# Altium PCB PWR_M_V1.PcbDoc
Units mm, origin at the board's own origin, x right, y up, seen from the top; angles counter-clockwise.
Board outline 29.46 x 19 mm, 2 copper layers (Top Layer, Bottom Layer); 42 components, 19 nets, 160 pads, 59 vias.
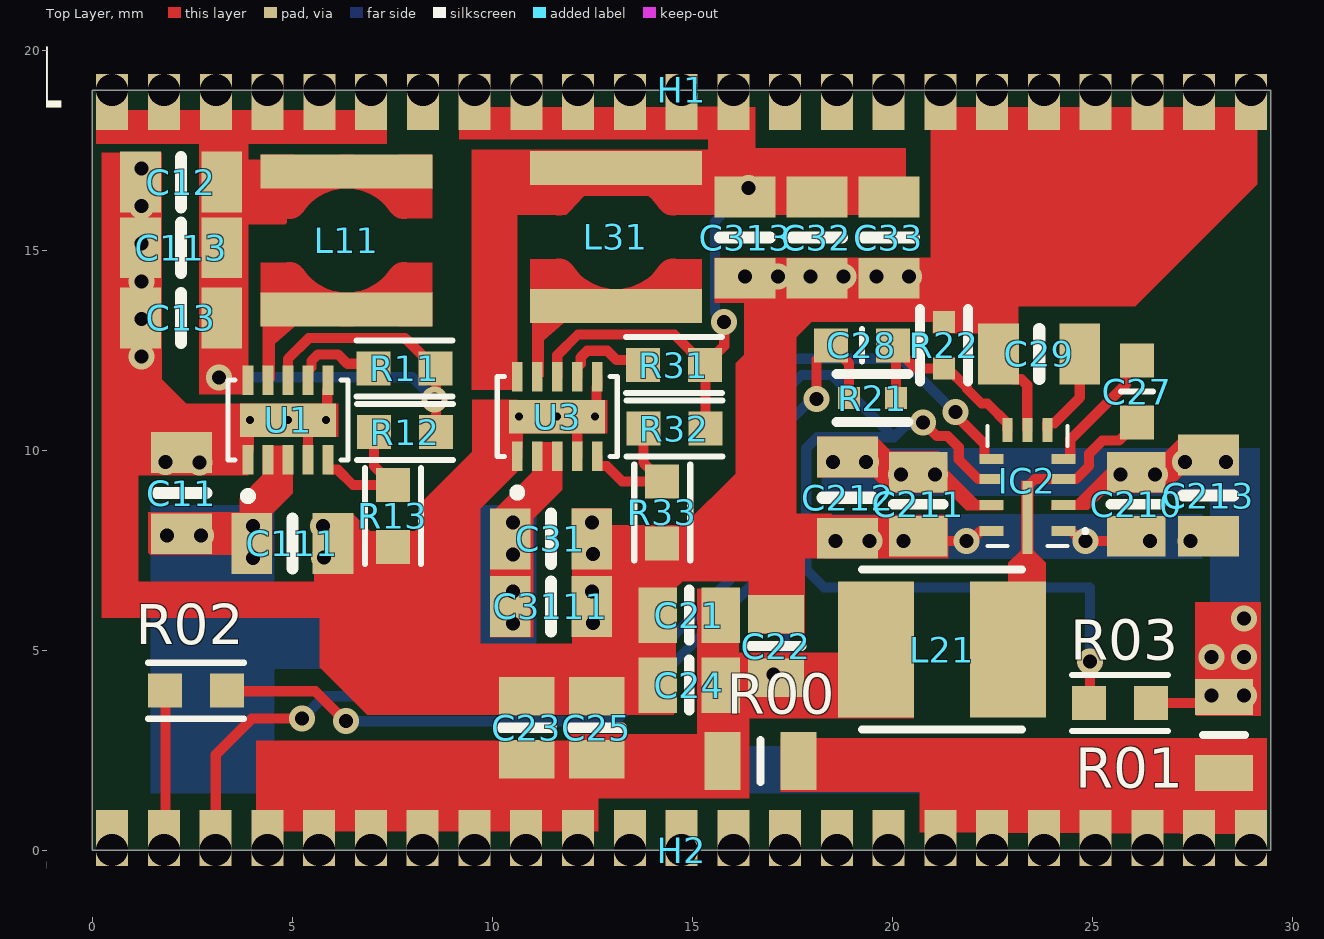
[diagram p0: Top Layer view]
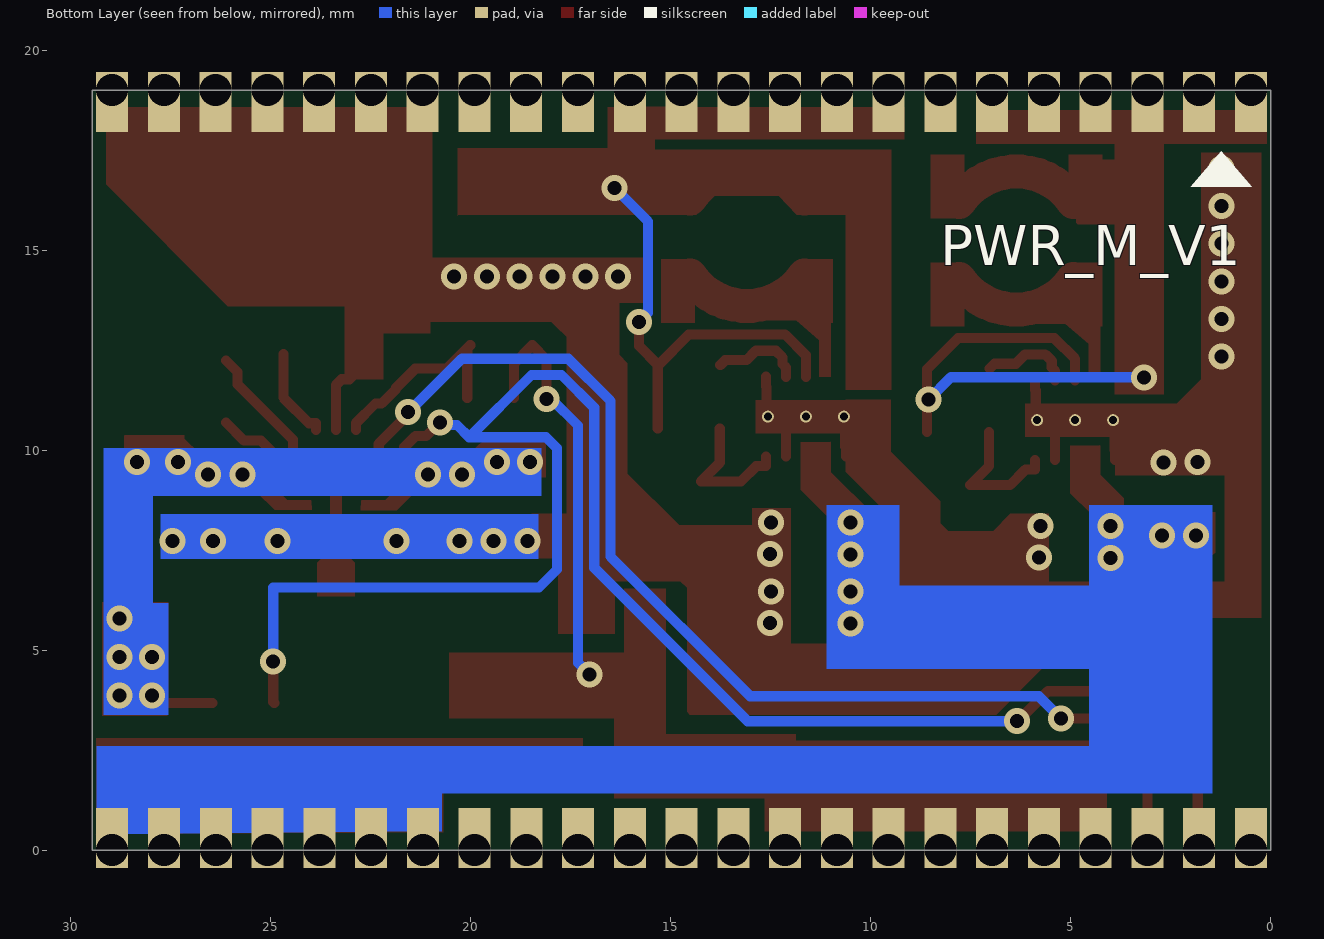
[diagram p1: Bottom Layer view, seen from below]
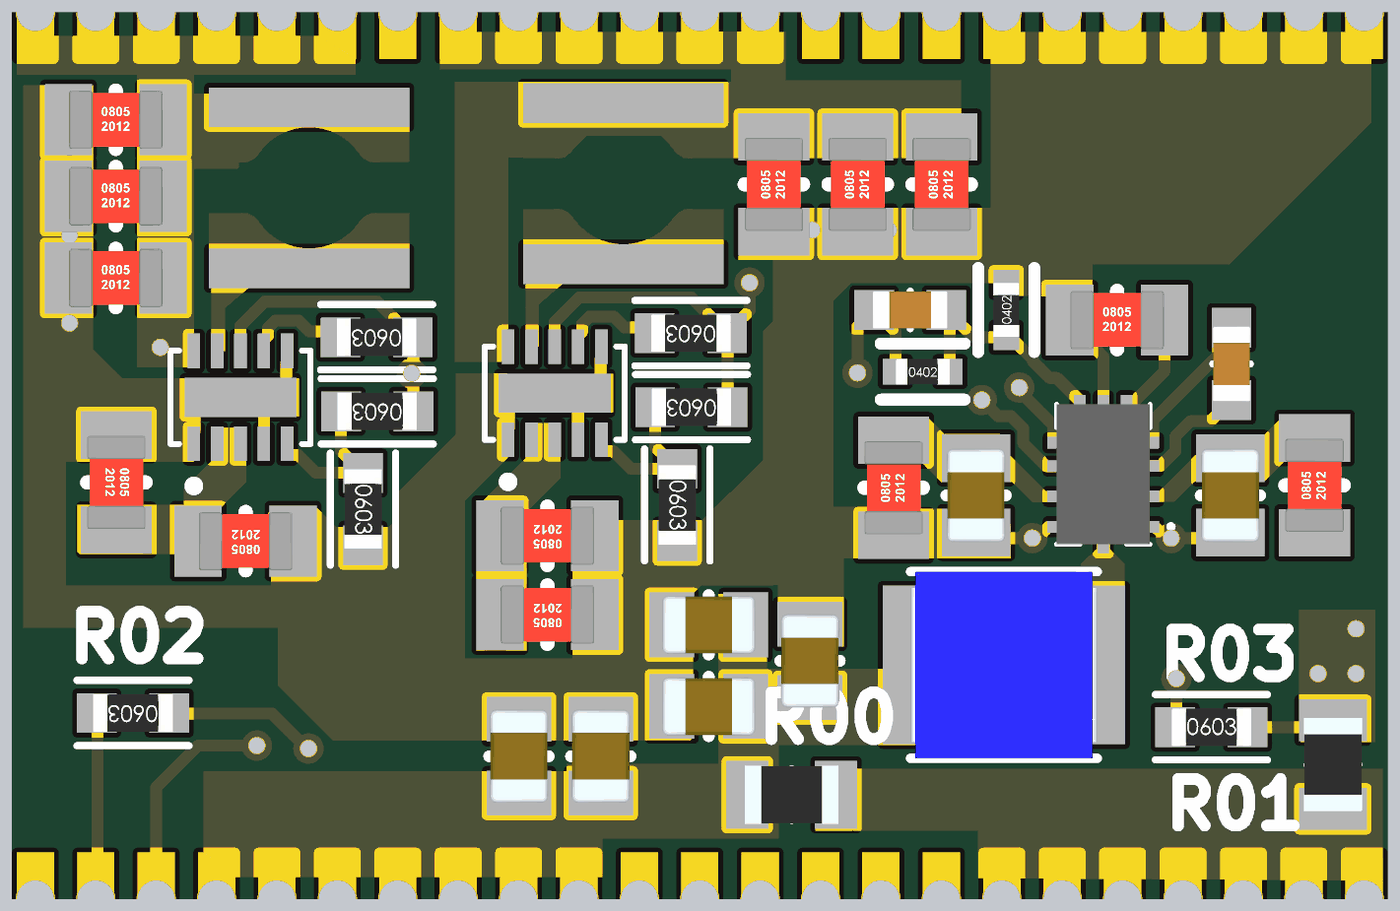
[diagram p2: 3D render of the assembled board from above, using the file's embedded part models]

## Layer stack, top to bottom
Top Solder: solder mask 0.0102, Solder Resist, Dk 3.5
Top Layer: signal copper 0.0356
Dielectric 1: dielectric 0.32, FR-4, Dk 4.8
Bottom Layer: signal copper 0.0356
Bottom Solder: solder mask 0.0102, Solder Resist, Dk 3.5

## Board outline
0,0 29.464,0 29.464,19 0,19

## Design rules (kind name [scope] priority, off if disabled: settings)
AssemblyTestPointUsage SilkToBoardRegionClearance_1 [All] p2:
AssemblyTestPointUsage SilkToBoardRegionClearance [All] p3:
Clearance [All] p1: gap=0.152 ignorepadtopadclearanceinfootprint=FALSE except(0: Arc-Hole Track-Hole SMDPad-Hole THPad-Hole Via-Hole Fill-Hole Poly-Hole Region-Hole Text-Hole)
HoleSize [All] p1: absolutevalues=TRUE maxlimit=6.35 minlimit=0.3 maxpercent=80.000 minpercent=20.000
MatchedLengths DiffPair_DIFF100MatchedLengths [InDifferentialPairClass('DIFF100')] p1: tolerance=0.152 checknetsindiffpair=TRUE checkdiffpairvsdiffpair=FALSE checkxsignals=FALSE checkothers=FALSE usedelayunits=FALSE
MinimumSolderMaskSliver [All] p1: minsoldermaskwidth=0.1
MinimumSolderMaskSliver SilkscreenOverComponentPads_2 [All] p2: minsoldermaskwidth=0.254
MinimumSolderMaskSliver SilkToSolderMaskClearance_1 [IsPad] p3: minsoldermaskwidth=0.254
MinimumSolderMaskSliver SilkscreenOverComponentPads_1 [All] p4: minsoldermaskwidth=0.254
MinimumSolderMaskSliver SilkToSolderMaskClearance [IsPad] p5: minsoldermaskwidth=0.254
MinimumSolderMaskSliver SilkscreenOverComponentPads [All] p6: minsoldermaskwidth=0.254
PolygonConnect [All] p1: connectstyle=Direct reliefconductorwidth=0.254 reliefentries=4 polygonreliefangle="90 Angle" airgapwidth=0.254
RoomDefinition PWR_M_V1 [InComponentClass('PWR_M_V1')] p1: confinementstyle=ConfineIn formatcopy=TRUE lockcomponents=FALSE outline -0.381,-0.635 29.731,-0.635 29.731,19.685 -0.381,19.685
RoutingVias [All] p1: holewidth=0.305 width=0.635 viastyle="Through Hole" minholewidth=0.305 minwidth=0.635 maxholewidth=0.711 maxwidth=1.27
SilkToBoardRegionClearance SilkToBoardRegionClearance_2 [All] p1:
SilkToSolderMaskClearance SilkToSolderMaskClearance_2 [IsPad] p1: minsilkscreentomaskgap=0.254 clearancetoexposedcopper=TRUE
SolderMaskExpansion [All] p1: expansion=0.102
Width [All] p1: maxlimit=2.54 minlimit=0.152 preferedwidth=0.254
26 further rules are at their usual default settings.

## Components (designator, comment, footprint, x,y, rotation, side; value= is the part's Value field where it differs from the comment)
C11 "2.2µF" SMD-0805C 2.235,8.928 r180 top
C12 "22µF" SMD-0805C 2.222,16.7 r270 top
C13 "22µF" SMD-0805C 2.222,13.31 r270 top
C21 "EMK212BB7106KG-T" CAPC2012X135N 14.924,5.877 r0 top
C22 "EMK212BB7106KG-T" CAPC2012X135N 17.094,5.105 r270 top
C23 "EMK212BB7106KG-T" CAPC2012X135N 10.858,3.061 r270 top
C24 "EMK212BB7106KG-T" CAPC2012X135N 14.924,4.127 r0 top
C25 "EMK212BB7106KG-T" CAPC2012X135N 12.611,3.061 r270 top
C27 "0.10µF" SMD-0603C 26.124,11.468 r0 top
C28 "22pF" SMD-0603C 19.241,12.624 r90 top
C29 "1µF" SMD-0805C 23.673,12.408 r270 top
C31 "2.2µF" SMD-0805C 11.468,7.785 r90 top
C32 "22µF" SMD-0805C 18.117,15.316 r0 top
C33 "22µF" SMD-0805C 19.914,15.316 r0 top
C111 "2.2µF" SMD-0805C 5.004,7.671 r90 top
C113 "22µF" SMD-0805C 2.222,15.062 r270 top
C210 "C0805C475K3RACAUTO" CAPC2012X125N 26.098,8.651 r90 top
C211 "C0805C475K3RACAUTO" CAPC2012X125N 20.65,8.651 r90 top
C212 "0.22µF" SMD-0805C 18.885,8.814 r0 top
C213 "0.22µF" SMD-0805C 27.902,8.865 r0 top
C313 "22µF" SMD-0805C 16.319,15.316 r0 top
C3111 "2.2µF" SMD-0805C 11.468,6.096 r90 top
H1 "CASTELLATED 23 pin" "CASTELLATED 23 pin" 28.966,19 r180 top locked
H2 "CASTELLATED 23 pin" "CASTELLATED 23 pin" 0.5,0 r0 top locked
IC2 "LMR36006BRNXT" LMR36015FSCQRNXTQ1 23.376,9.103 r180 top
L11 "SRR3011-100YL" SRR3011-100YL 6.363,16.967 r180 top
L21 "ASPI-4030S-330M-T" INDPM4040X300N 21.247,5.016 r180 top
L31 "SRR3011-100YL" SRR3011-100YL 13.094,17.056 r180 top
R00 "CRCW08050000Z0EAC" RESC2012X60N 16.7,2.235 r0 top
R01 "CRCW08050000Z0EAC" RESC2012X60N 28.296,2.883 r270 top
R02 "10k" SMD-0603-RES 2.591,3.988 r90 top
R03 "10k" SMD-0603-RES 25.692,3.683 r270 top
R11 "100k" SMD-0603-RES 7.81,12.04 r90 top
R12 "47k" SMD-0603-RES 7.823,10.452 r90 top
R13 "15k" SMD-0603-RES 7.518,8.357 r180 top
R21 "100k" SMD-0402-RES 19.507,11.303 r270 top
R22 "9.1k" SMD-0402-RES 21.298,12.624 r0 top
R31 "100k" SMD-0603-RES 14.541,12.128 r90 top
R32 "47k" SMD-0603-RES 14.554,10.541 r90 top
R33 "15k" SMD-0603-RES 14.249,8.445 r180 top
U1 "TPS62175DQCR" *SON50P300X200X80-11N240X84_TPS62175DQCR(Primary) 4.894,10.753 r90 top
U3 "TPS62175DQCR" *SON50P300X200X80-11N240X84_TPS62175DQCR(Primary) 11.625,10.841 r90 top

## Footprints (in the part's own frame and the unit in brackets; to place one, negate y for a bottom-side part, rotate by r counter-clockwise, add the part's x,y. Pads: shape width x height; smd on the part's side, far side on the other; paste and mask are expansions set on the pad)
*SON50P300X200X80-11N240X84_TPS62175DQCR(Primary) [mm]
  rect 0.74x0.27 smd: 1(-0.995,1) 2(-0.995,0.5) 3(-0.995,0) 4(-0.995,-0.5) 5(-0.995,-1) 6(0.995,-1) 7(0.995,-0.5) 8(0.995,0) 9(0.995,0.5) 10(0.995,1)
  rect 0.84x2.4 smd: 11(0,0)
  round 0.3 hole 0.2: 11_1(0,0.95) 11_2(0,0) 11_3(0,-0.95)
  silkscreen extent -2,-1.5 1,1.5
CAPC2012X125N [mm]
  rect 1.02x1.47 smd: 1(-0.8,0) 2(0.8,0)
  silkscreen extent 0,-0.64 0,0.64, body extent -1,-0.63 1,0.63, height 1.25
CAPC2012X135N [mm]
  rect 0.96x1.39 smd: 1(-0.79,0) 2(0.79,0)
  silkscreen extent 0,-0.64 0,0.64, body extent -1,-0.63 1,0.63, height 1.35
"CASTELLATED 23 pin" [mm]
  rect 0.8x1.4 / inner rect 0.8x1.5 / far side rect 0.8x1.5 hole 0.8 copper offset 0,0.3: 1(0,0) 2(1.294,0) 3(2.587,0) 4(3.881,0) 5(5.175,0) 6(6.469,0) 7(7.762,0) 8(9.056,0) 9(10.35,0) 10(11.644,0) 11(12.938,0) 12(14.232,0) 13(15.526,0) 14(16.82,0) 15(18.114,0) 16(19.408,0) 17(20.702,0) 18(21.996,0) 19(23.29,0) 20(24.584,0) 21(25.878,0) 22(27.172,0) 23(28.466,0)
INDPM4040X300N [mm]
  rect 1.9x3.4 smd: 1(-1.65,0) 2(1.65,0)
  silkscreen extent -2,-2 2,2, body extent -2,-2 2,2, height 3
LMR36015FSCQRNXTQ1 [mm]
  rect 0.6x0.25 smd: 1(-0.9,1.125) 2(-0.9,0.475) 3(-0.9,-0.175) 4(-0.9,-0.675) 8(0.9,-0.675) 9(0.9,-0.175) 10(0.9,0.475) 11(0.9,1.125)
  rect 0.25x0.6 smd: 5(-0.5,-1.4) 6(0,-1.4) 7(0.5,-1.4)
  rect 0.25x1.825 smd: 12(0,0.788)
  silkscreen extent -1.5,-1.5 1,1.5, body extent -1,-1.5 1,1.5, height 1
RESC2012X60N [mm]
  rect 0.9x1.45 smd: 1(-0.95,0) 2(0.95,0)
  silkscreen extent 0,-0.53 0,0.53, body extent -1,-0.63 1,0.63, height 0.6
SMD-0402-RES [mm]
  rect 0.55x0.55 smd: 1(0,0.584) 2(0,-0.584)
  silkscreen extent -0.6,-0.9 0.6,0.9, body extent -0.28,-0.57 0.27,0.58, height 0.41
SMD-0603-RES [mm]
  rect 0.85x0.85 smd: 1(0,0.775) 2(0,-0.775)
  silkscreen extent -0.7,-1.2 0.7,1.2, body extent -0.4,-0.85 0.4,0.85, height 0.56
SMD-0603C [mm]
  rect 0.85x0.85 smd: 1(0,0.775) 2(0,-0.775)
  silkscreen extent -0.4,0 0.4,0, body extent -0.4,-0.8 0.4,0.8, height 0.9
SMD-0805C [mil]
  rect 60x40 smd: 1(0,40) 2(0,-40)
  silkscreen extent -25,0 25,0, body extent -25,-39 25,39, height 35
SRR3011-100YL [mm]
  rect 4.3x0.85 smd: 1(0,3.45) 2(0,0)
  Top Layer region: 1.3,2.275 2.15,2.275 2.15,3.875 1.3,3.875
  Top Layer region: -2.15,2.275 -1.3,2.275 -1.3,3.875 -2.15,3.875
  Top Layer region: 1.3,-0.425 2.15,-0.425 2.15,1.175 1.3,1.175
  Top Layer region: -2.15,-0.425 -1.3,-0.425 -1.3,1.175 -2.15,1.175
  Top Layer lines w0.85: 1.43,2.69 ccw(c0,1.725) -1.43,2.69 ; 1.43,0.76 cw(c0,1.725) -1.43,0.76

## Part data
C11 C31 C111 C3111: library part GCM21BR71E225KA73L, "CAP CER 2.2UF 25V X7R 0805", Digi-Key Part Number=490-4787-1-ND, Manufacturer="Murata Electronics North America", Operating Temperature="-55°C ~ 125°C", Package / Case="0805 (2012 Metric)", Ratings=AEC-Q200, Supplier Part Number 1=81-GCM21BR71E225KA3L, Temperature Coefficient=X7R, Tolerance=±10%, Voltage=25V, @ qty=0, Applications=Automotive, Datasheets=http://www.murata.com/~/media/webrenewal/support/library/catalog/products/capacitor/mlcc/c03e.ashx, Factory Stock=0, Features=-, Height - Seated (Max)=-, Image=//media.digikey.com/photos/Murata%20Photos/NCP,GCM%20SERIES%200805.jpg, Lead Spacing=-, Lead Style=-, Minimum Quantity=1, Mounting Type="Surface Mount, MLCC", Packaging="Cut Tape (CT)", Part Number=GCM21BR71E225KA73L, Part Status=Active, Quantity Available=18461, Series=GCM, Size / Dimension="0.079\" L x 0.049\" W (2.00mm x 1.25mm)", Supplier 1=Mouser, Thickness (Max)="0.055\" (1.40mm)", Unit Price (USD)=0.35
C12 C13 C32 C33 C113 C313: library part GRM21BR60J226ME39L, "CAP CER 22UF 6.3V X5R 0805", Digi-Key Part Number=490-1719-1-ND, Manufacturer="Murata Electronics North America", Operating Temperature="-55°C ~ 85°C", Package / Case="0805 (2012 Metric)", Ratings=-, Supplier Part Number 1=81-GRM21R60J226ME39L, Temperature Coefficient=X5R, Tolerance=±20%, Voltage=6.3V, @ qty=0, Applications="General Purpose", Datasheets=http://www.murata.com/~/media/webrenewal/support/library/catalog/products/capacitor/mlcc/c02e.pdf, Factory Stock=0, Features=-, Height - Seated (Max)=-, Image=//media.digikey.com/Renders/Murata%20Renders/0805%20(2012%20Metric)%20.85mm.jpg, Lead Spacing=-, Lead Style=-, Minimum Quantity=1, Mounting Type="Surface Mount, MLCC", Packaging="Cut Tape (CT)", Part Number=GRM21BR60J226ME39L, Part Status=Active, Quantity Available=983766, Series=GRM, Size / Dimension="0.079\" L x 0.049\" W (2.00mm x 1.25mm)", Supplier 1=Mouser, Thickness (Max)="0.053\" (1.35mm)", Unit Price (USD)=0,24
C21 C22 C23 C24 C25: "Capacitor", Manufacturer_Name="TAIYO YUDEN", Supplier Part Number 1=963-EMK212BB7106KG-T, Height=1.35mm, Manufacturer_Part_Number=EMK212BB7106KG-T, Supplier 1=Mouser
C27: library part GCJ188R71H104KA12D, "CAP CER 0.1UF 50V X7R 0603", Digi-Key Part Number=490-5798-1-ND, Manufacturer="Murata Electronics North America", Operating Temperature="-55°C ~ 125°C", Package / Case="0603 (1608 Metric)", Ratings=AEC-Q200, Supplier Part Number 1=81-GCJ188R71H104KA2D, Temperature Coefficient=X7R, Tolerance=±10%, Voltage=50V, @ qty=0, Applications="Automotive, Boardflex Sensitive", Datasheets=http://www.murata.com/~/media/webrenewal/support/library/catalog/products/capacitor/mlcc/c03e.ashx, Factory Stock=0, Features="Soft Termination", Height - Seated (Max)=-, Image=//media.digikey.com/Renders/Murata%20Renders/0603%28LQG18%29.jpg, Lead Spacing=-, Lead Style=-, Minimum Quantity=1, Mounting Type="Surface Mount, MLCC", Packaging="Cut Tape (CT)", Part Number=GCJ188R71H104KA12D, Part Status=Active, Quantity Available=163695, Series=GCJ, Size / Dimension="0.063\" L x 0.031\" W (1.60mm x 0.80mm)", Supplier 1=Mouser, Thickness (Max)="0.035\" (0.90mm)", Unit Price (USD)=0.12
C28: library part GCM1885C2A220JA16D, "CAP CER 22PF 100V NP0 0603", Digi-Key Part Number=490-4942-1-ND, Manufacturer="Murata Electronics North America", Operating Temperature="-55°C ~ 125°C", Package / Case="0603 (1608 Metric)", Ratings=AEC-Q200, Supplier Part Number 1=81-GCM1885C2A220J16D, Temperature Coefficient="C0G, NP0", Tolerance=±5%, Voltage=100V, @ qty=0, Applications=Automotive, Datasheets=http://www.murata.com/~/media/webrenewal/support/library/catalog/products/capacitor/mlcc/c03e.ashx, Factory Stock=0, Features=-, Height - Seated (Max)=-, Image=//media.digikey.com/Renders/Murata%20Renders/0603%28GCM188%29.jpg, Lead Spacing=-, Lead Style=-, Minimum Quantity=1, Mounting Type="Surface Mount, MLCC", Packaging="Cut Tape (CT)", Part Number=GCM1885C2A220JA16D, Part Status=Active, Quantity Available=39916, Series=GCM, Size / Dimension="0.063\" L x 0.031\" W (1.60mm x 0.80mm)", Supplier 1=Mouser, Thickness (Max)="0.035\" (0.90mm)", Unit Price (USD)=0.11
C29: library part GCJ21BR71H105KA01L, "CAP CER 1UF 50V X7R 0805", Digi-Key Part Number=490-10667-1-ND, Manufacturer="Murata Electronics North America", Operating Temperature="-55°C ~ 125°C", Package / Case="0805 (2012 Metric)", Ratings=AEC-Q200, Supplier Part Number 1=81-GCJ21BR71H105KA1L, Temperature Coefficient=X7R, Tolerance=±10%, Voltage=50V, @ qty=0, Applications="Automotive, Boardflex Sensitive", Datasheets=http://www.murata.com/~/media/webrenewal/support/library/catalog/products/capacitor/mlcc/c03e.ashx, Factory Stock=0, Features="Soft Termination", Height - Seated (Max)=-, Image=//media.digikey.com/Renders/Murata%20Renders/0805%20(2012%20Metric)%20.85mm.jpg, Lead Spacing=-, Lead Style=-, Minimum Quantity=1, Mounting Type="Surface Mount, MLCC", Packaging="Cut Tape (CT)", Part Number=GCJ21BR71H105KA01L, Part Status=Active, Quantity Available=55137, Series=GCJ, Size / Dimension="0.079\" L x 0.049\" W (2.00mm x 1.25mm)", Supplier 1=Mouser, Thickness (Max)="0.057\" (1.45mm)", Unit Price (USD)=0.33
C210 C211: "Capacitor", Manufacturer_Name=Kemet, Mouser2 Part Number=80-C0805C475K3RAUTO, Datasheet Link=https://componentsearchengine.com/Datasheets/1/C0805C475K3RACAUTO.pdf, Height=1.25mm, Manufacturer_Part_Number=C0805C475K3RACAUTO, Mouser2 Price/Stock=https://www.mouser.com/Search/Refine.aspx?Keyword=80-C0805C475K3RAUTO, Supplier 1=Mouser, Supplier Part Number 1=80-C0805C475K3RAUTO
C212 C213: library part GCM21BR71H224KA37K, "CAP CER 0.22UF 50V X7R 0805", Digi-Key Part Number=490-13311-1-ND, Manufacturer="Murata Electronics North America", Operating Temperature="-55°C ~ 125°C", Package / Case="0805 (2012 Metric)", Ratings=AEC-Q200, Supplier Part Number 1=81-GCM21BR71H224KA7K, Temperature Coefficient=X7R, Tolerance=±10%, Voltage=50V, @ qty=0, Applications=Automotive, Datasheets=http://www.murata.com/~/media/webrenewal/support/library/catalog/products/capacitor/mlcc/c03e.ashx, Factory Stock=0, Features=-, Height - Seated (Max)=-, Image=//media.digikey.com/photos/Murata%20Photos/NCP,GCM%20SERIES%200805.jpg, Lead Spacing=-, Lead Style=-, Minimum Quantity=1, Mounting Type="Surface Mount, MLCC", Packaging="Cut Tape (CT)", Part Number=GCM21BR71H224KA37K, Part Status=Active, Quantity Available=9007, Series=GCM, Size / Dimension="0.079\" L x 0.049\" W (2.00mm x 1.25mm)", Supplier 1=Mouser, Thickness (Max)="0.055\" (1.40mm)", Unit Price (USD)=0.24
IC2: "Integrated Circuit", Manufacturer_Name="Texas Instruments", Mouser2 Part Number=595-LMR36006BRNXT, Datasheet Link=http://www.ti.com/lit/gpn/LMR36006, Height=0.9mm, Manufacturer_Part_Number=LMR36006BRNXT, Mouser2 Price/Stock=https://www.mouser.com/Search/Refine.aspx?Keyword=595-LMR36006BRNXT, Supplier 1=Mouser, Supplier Part Number 1=595-LMR36006BRNXT
L11 L31: Supplier Part Number 1=652-SRR3011-100YL, Supplier 1=Mouser
L21: Supplier Part Number 1=815-ASPI-4030S-330MT, Supplier 1=Mouser
R00 R01: "Resistor", Manufacturer_Name=Vishay, Mouser2 Part Number=71-CRCW08050000Z0EAC, Datasheet Link=https://componentsearchengine.com/Datasheets/1/CRCW08050000Z0EAC.pdf, Height=0.6mm, Manufacturer_Part_Number=CRCW08050000Z0EAC, Mouser2 Price/Stock=https://www.mouser.com/Search/Refine.aspx?Keyword=71-CRCW08050000Z0EAC
R02 R03: library part ERJ-3EKF1002V, "RES SMD 10K OHM 1% 1/10W 0603", Digi-Key Part Number=P10.0KHCT-ND, Manufacturer="Panasonic Electronic Components", Operating Temperature="-55°C ~ 155°C", Package / Case="0603 (1608 Metric)", Power (Watts)="0.1W, 1/10W", Supplier Device Package=0603, Supplier Part Number 1=667-ERJ-3EKF1002V, Temperature Coefficient=±100ppm/°C, Tolerance=±1%, @ qty=1500, Composition="Thick Film", Datasheets=http://industrial.panasonic.com/www-cgi/jvcr13pz.cgi?E+PZ+3+AOA0002+ERJ3EKF1002V+7+WW, Factory Stock=0, Failure Rate=-, Features="Automotive AEC-Q200", Height - Seated (Max)="0.022\" (0.55mm)", Image=//media.digikey.com/Photos/Panasonic%20Photos/MFG_ERJ-P6W%20Series.jpg, Minimum Quantity=1, Number of Terminations=2, Packaging="Cut Tape (CT)", Part Number=ERJ-3EKF1002V, Part Status=Active, Quantity Available=6703141, Series=ERJ, Size / Dimension="0.063\" L x 0.031\" W (1.60mm x 0.80mm)", Supplier 1=Mouser, Unit Price (USD)=0.00379
R11 R31: library part ERJ-PA3J104V, "RES SMD 100K OHM 5% 1/4W 0603", Digi-Key Part Number=P100KBZCT-ND, Manufacturer="Panasonic Electronic Components", Operating Temperature="-55°C ~ 155°C", Package / Case="0603 (1608 Metric)", Power (Watts)="0.25W, 1/4W", Supplier Device Package=0603, Supplier Part Number 1=667-ERJ-PA3J104V, Temperature Coefficient=±200ppm/°C, Tolerance=±5%, @ qty=1500, Composition="Thick Film", Datasheets=https://industrial.panasonic.com/cdbs/www-data/pdf/RDA0000/AOA0000C243.pdf, Factory Stock=0, Failure Rate=-, Features="Automotive AEC-Q200, Pulse Withstanding", Height - Seated (Max)="0.022\" (0.55mm)", Image=//media.digikey.com/Photos/Panasonic%20Photos/MFG_ERJ-P6W%20Series.jpg, Minimum Quantity=1, Number of Terminations=2, Packaging="Cut Tape (CT)", Part Number=ERJ-PA3J104V, Part Status=Active, Quantity Available=4793, Series=ERJ, Size / Dimension="0.063\" L x 0.031\" W (1.60mm x 0.80mm)", Supplier 1=Mouser, Unit Price (USD)=0.01646
R12 R32: library part ERJ-PA3F4702V, "RES SMD 47K OHM 1% 1/4W 0603", Digi-Key Part Number=P47KBYCT-ND, Manufacturer="Panasonic Electronic Components", Operating Temperature="-55°C ~ 155°C", Package / Case="0603 (1608 Metric)", Power (Watts)="0.25W, 1/4W", Supplier Device Package=0603, Supplier Part Number 1=667-ERJ-PA3F4702V, Temperature Coefficient=±100ppm/°C, Tolerance=±1%, @ qty=1500, Composition="Thick Film", Datasheets=https://industrial.panasonic.com/cdbs/www-data/pdf/RDA0000/AOA0000C243.pdf, Factory Stock=0, Failure Rate=-, Features="Automotive AEC-Q200, Pulse Withstanding", Height - Seated (Max)="0.022\" (0.55mm)", Image=//media.digikey.com/Photos/Panasonic%20Photos/MFG_ERJ-P6W%20Series.jpg, Minimum Quantity=1, Number of Terminations=2, Packaging="Cut Tape (CT)", Part Number=ERJ-PA3F4702V, Part Status=Active, Quantity Available=7124, Series=ERJ, Size / Dimension="0.063\" L x 0.031\" W (1.60mm x 0.80mm)", Supplier 1=Mouser, Unit Price (USD)=0.02372
R13 R33: library part ERJ-PA3F1502V, "RES SMD 15K OHM 1% 1/4W 0603", Digi-Key Part Number=P15KBYCT-ND, Manufacturer="Panasonic Electronic Components", Operating Temperature="-55°C ~ 155°C", Package / Case="0603 (1608 Metric)", Power (Watts)="0.25W, 1/4W", Supplier Device Package=0603, Supplier Part Number 1=667-ERJ-PA3F1502V, Temperature Coefficient=±100ppm/°C, Tolerance=±1%, @ qty=1500, Composition="Thick Film", Datasheets=https://industrial.panasonic.com/cdbs/www-data/pdf/RDA0000/AOA0000C243.pdf, Factory Stock=0, Failure Rate=-, Features="Automotive AEC-Q200, Pulse Withstanding", Height - Seated (Max)="0.022\" (0.55mm)", Image=//media.digikey.com/Photos/Panasonic%20Photos/MFG_ERJ-P6W%20Series.jpg, Minimum Quantity=1, Number of Terminations=2, Packaging="Cut Tape (CT)", Part Number=ERJ-PA3F1502V, Part Status=Active, Quantity Available=8940, Series=ERJ, Size / Dimension="0.063\" L x 0.031\" W (1.60mm x 0.80mm)", Supplier 1=Mouser, Unit Price (USD)=0.02372
R21: library part ERJ-2RKF1003X, "RES SMD 100K OHM 1% 1/10W 0402", Digi-Key Part Number=P100KLCT-ND, Manufacturer="Panasonic Electronic Components", Operating Temperature="-55°C ~ 155°C", Package / Case="0402 (1005 Metric)", Power (Watts)="0.1W, 1/10W", Supplier Device Package=0402, Supplier Part Number 1=667-ERJ-2RKF1003X, Temperature Coefficient=±100ppm/°C, Tolerance=±1%, @ qty=1500, Composition="Thick Film", Datasheets=http://industrial.panasonic.com/www-cgi/jvcr13pz.cgi?E+PZ+3+AOA0002+ERJ2RKF1003X+7+WW, Factory Stock=0, Failure Rate=-, Features="Automotive AEC-Q200", Height - Seated (Max)="0.016\" (0.40mm)", Image=//media.digikey.com/Photos/Panasonic%20Photos/ERJ-PA2-Series.jpg, Minimum Quantity=1, Number of Terminations=2, Packaging="Cut Tape (CT)", Part Number=ERJ-2RKF1003X, Part Status=Active, Quantity Available=2645965, Series=ERJ, Size / Dimension="0.039\" L x 0.020\" W (1.00mm x 0.50mm)", Supplier 1=Mouser, Unit Price (USD)=0.00496
R22: library part ERJ-2RKF9101X, "RES SMD 9.1K OHM 1% 1/10W 0402", Digi-Key Part Number=P9.10KLCT-ND, Manufacturer="Panasonic Electronic Components", Operating Temperature="-55°C ~ 155°C", Package / Case="0402 (1005 Metric)", Power (Watts)="0.1W, 1/10W", Supplier Device Package=0402, Supplier Part Number 1=667-ERJ-2RKF9101X, Temperature Coefficient=±100ppm/°C, Tolerance=±1%, @ qty=1500, Composition="Thick Film", Datasheets=http://industrial.panasonic.com/www-cgi/jvcr13pz.cgi?E+PZ+3+AOA0002+ERJ2RKF9101X+7+WW, Factory Stock=0, Failure Rate=-, Features="Automotive AEC-Q200", Height - Seated (Max)="0.016\" (0.40mm)", Image=//media.digikey.com/Photos/Panasonic%20Photos/ERJ-PA2-Series.jpg, Minimum Quantity=1, Number of Terminations=2, Packaging="Cut Tape (CT)", Part Number=ERJ-2RKF9101X, Part Status=Active, Quantity Available=92711, Series=ERJ, Size / Dimension="0.039\" L x 0.020\" W (1.00mm x 0.50mm)", Supplier 1=Mouser, Unit Price (USD)=0.00496
U1 U3: "28V, 0.5A Step-Down Converter with SNOOZE Mode 10-WSON -40 to 85", Package="WSON-10 Texas Instruments", Supplier Part Number 1=595-TPS62175DQCR, Availability=Unavailable, MF="Texas Instruments", MP=TPS62175DQCR, Price=None, SnapEDA_Link=https://www.snapeda.com/parts/TPS62175DQCR/Texas%20Instruments/view-part/?ref=snap, Supplier 1=Mouser

## Via types
v1: diameter 0.65/0.65 (per signal layer), hole 0.35, Top Layer to Bottom Layer, tented both sides, 59 vias

## Nets (pads, with @x,y where several pads share a name; then routed paths per layer and width w, separated by ;. In a path a pad name is that pad's centre, name@x,y a point inside that pad or via, vN(x,y) a via of type N, cw(c..) or ccw(c..) an arc to the next point about the centre after c; other vN are vias at no path point)
DCDC_VCC_IN: C210.2 C211.2 C212.1 C213.1 IC2.2 IC2.10 R01.1 R03.1 | length 1.9
  Top Layer w0.254: R03.1 28.146,3.683 R01.1
  other v1: 27.978,3.873 28.791,3.873 27.978,4.832 28.791,4.832 28.791,5.791 20.218,9.398 21.069,9.398 25.705,9.398 26.568,9.398 18.517,9.703 19.342,9.703 27.318,9.703 28.346,9.703
EN: IC2.9 R02.2 R03.2 | length 42.5
  Top Layer w0.254: R02.2 3.378,3.975 5.575,3.975 6.325,3.226 v1(6.35,3.226) ; v1@20.774,10.685 20.788,10.685 21.121,10.352 21.389,10.352 21.665,10.076 21.665,9.769 22.156,9.278 IC2.9 ; R03.2 24.943,3.709 v1(24.943,4.724)
  Bottom Layer w0.254: v1(6.35,3.226) 13.081,3.226 16.916,7.061 16.916,11.066 17.733,11.882 18.484,11.882 20.041,10.325 ; v1@20.815,10.652 v1(20.774,10.694) 20.711,10.631 20.346,10.631 20.041,10.325 ; v1(24.943,4.724) 24.943,6.567 18.299,6.567 17.849,7.018 17.849,10.052 18.121,10.325 20.041,10.325
GND: C11.2 C12.2 C13.2 C21.1 C22.1 C23.1 C24.1 C25.1 C29.2 C31.2 C32.2 C33.2 C111.2 C113.2 C210.1 C211.1 C212.2 C213.2 C313.2 C3111.2 H1.1 H1.2 H1.3 H1.4 H1.5 H1.6 H1.7 IC2.1 IC2.6 IC2.11 R13.1 R22.1 R33.1 U1.1 U1.4 U1.6 U1.11 U1.11_1 U1.11_2 U1.11_3 U3.1 U3.4 U3.6 U3.11 U3.11_1 U3.11_2 U3.11_3 | length 43.6
  Top Layer w0.254: U1.1 3.894,9.993 3.912,10.01 3.912,10.459 4.205,10.753 U1.11_2 U1.11@5.584,10.753 ; U1.4 5.394,10.563 U1.11@5.584,10.753 ; U1.6 5.894,11.512 5.877,11.495 5.877,11.046 U1.11@5.584,10.753 ; C111.2 6.109,7.582 R13.1 ; U3.1 10.625,10.081 10.643,10.099 10.643,10.548 10.936,10.841 U3.11_2 U3.11@12.315,10.841 ; C23.1 C25.1 13.857,3.851 C24.1 C21.1 14.465,6.209 14.465,6.604 14.713,6.851 16.303,6.851 16.957,7.506 17.374,7.506 17.374,12.777 17.925,13.328 R22.1@21.204,13.328 ; U3.4 12.125,10.652 U3.11@12.315,10.841 ; U3.6 12.625,11.601 12.608,11.584 12.608,11.134 U3.11@12.315,10.841 ; C31.2@12.751,7.76 12.84,7.671 R33.1 ; C32.2@18.224,14.491 18.351,14.618 19.952,14.618 21.001,14.618 21.232,14.386 21.204,14.358 R22.1@21.204,13.328 ; C211.1 20.766,7.734 v1(21.857,7.734) 21.96,7.734 22.203,7.978 IC2.11 ; IC2.6 23.376,11.624 23.227,11.773 23.038,11.773 22.657,12.154 C29.2 22.657,12.662 22.276,13.043 22.022,13.043 21.857,13.208 R22.1 21.204,13.302 R22.1@21.204,13.328 ; IC2.1 24.482,7.978 24.725,7.734 v1(24.828,7.734) 25.982,7.734 C210.1
  other v1: 12.522,5.677 12.497,6.464 5.791,7.315 12.522,7.404 18.58,7.734 19.431,7.734 20.282,7.734 26.441,7.734 27.457,7.734 5.766,8.103 12.497,8.191 2.68,9.69 1.829,9.703 1.232,12.344 1.232,13.284 1.232,14.224 16.319,14.338 17.14,14.338 17.96,14.338 18.781,14.338 19.601,14.338 20.422,14.338 1.232,15.164 1.232,16.104 1.232,17.043
NetC27_1: C27.1 IC2.4 | length 3.3
  Top Layer w0.254: IC2.4 24.447,9.778 24.449,9.78 24.449,10.263 25.836,11.65 25.836,11.955 C27.1
NetC27_2: C27.2 IC2.3 IC2.12 L21.1 | length 4.4
  Top Layer w0.254: IC2.12 23.376,9.098 23.378,9.1 23.388,9.1 23.52,9.233 23.565,9.278 IC2.3 24.278,9.28 24.598,9.28 24.923,9.605 24.923,9.915 25.248,10.24 25.671,10.24 C27.2
NetC28_2: C28.2 IC2.7 R21.1 R22.2 | length 5.1
  Top Layer w0.254: C28.2 C28.2@20.091,12.548 ; R21.1 C28.2@20.091,12.548 ; IC2.7 22.876,10.674 22.383,11.167 22.233,11.167 21.869,11.53 21.869,11.561 21.391,12.04 R22.2 20.6,12.04 C28.2@20.091,12.548
NetC29_1: C29.1 IC2.5 | length 2.3
  Top Layer w0.254: IC2.5 23.876,10.674 23.878,10.676 24.049,10.676 24.689,11.316 C29.1
NetL11_1: L11.1 U1.9
NetL31_1: L31.1 U3.9
NetR11_1: R11.1 U1.7 | length 2.3
  Top Layer w0.254: U1.7 5.394,11.983 5.48,12.068 5.48,12.233 5.643,12.397 6.145,12.397 6.378,12.164 6.912,12.164 R11.1
NetR12_1: R12.1 R13.2 U1.5 | length 3.5
  Top Layer w0.254: U1.5 5.894,9.523 5.902,9.514 6.137,9.514 6.52,9.132 R13.2 7.048,9.602 R12.1
NetR31_1: R31.1 U3.7 | length 2.3
  Top Layer w0.254: U3.7 12.125,12.071 12.211,12.157 12.211,12.322 12.374,12.486 12.876,12.486 13.109,12.252 13.643,12.252 R31.1
NetR32_1: R32.1 R33.2 U3.5 | length 3.5
  Top Layer w0.254: U3.5 12.625,9.611 12.633,9.603 12.868,9.603 13.251,9.22 R33.2 13.779,9.691 R32.1
PWR1: H2.3 IC2.8 | length 29.5
  Top Layer w0.254: H2.3 3.087,2.388 3.989,3.289 v1(5.245,3.289) ; v1(21.576,10.961) 21.576,10.885 22.303,10.158 22.303,9.78 22.305,9.778 IC2.8
  Bottom Layer w0.254: v1(5.245,3.289) 5.804,3.848 13.018,3.848 16.51,7.341 16.51,11.234 17.565,12.288 20.226,12.288 21.565,10.95 v1(21.576,10.961)
PWR2: H2.2 R02.1 | length 4
  Top Layer w0.254: H2.2 1.829,0.035 R02.1@1.829,3.988
VCC1: C21.2 C22.2 C23.2 C24.2 C25.2 C28.1 H2.4 H2.5 H2.6 H2.7 H2.8 H2.9 H2.10 L21.2 R00.1 R21.2 | length 10.4
  Top Layer w0.254: v1(18.11,11.278) 18.11,12.268 C28.1 18.923,12.166 R21.2
  Bottom Layer w0.254: v1(17.031,4.394) 17.323,4.686 17.323,10.617 17.983,11.278 v1(18.11,11.278)
VCC2: C12.1 C13.1 C113.1 H1.18 H1.19 H1.20 H1.21 H1.22 H1.23 L11.2 R11.2 R12.2 U1.8 U1.10 | length 12
  Top Layer w0.254: U1.8 4.894,12.284 5.413,12.803 7.822,12.803 R11.2 8.598,12.027 R12.2
  Bottom Layer w0.254: v1(3.175,11.824) 8.001,11.824 v1(8.56,11.265)
VCC3: C32.1 C33.1 C313.1 H1.11 H1.12 H1.13 H1.14 H1.15 H1.16 L31.2 R31.2 R32.2 U3.8 U3.10 | length 27.1
  Top Layer w0.254: H1.16 9.787,18.771 9.787,18.326 10.703,18.326 10.703,18.851 H1.15 10.852,18.4 11.094,18.158 11.094,18.307 11.125,18.338 11.873,18.338 12.146,18.611 H1.14@12.146,18.641 ; U3.8 11.625,12.373 12.144,12.892 14.553,12.892 R31.2 ; H1.14 H1.14@12.146,18.641 ; H1.13 H1.13@13.44,18.611 ; H1.12 H1.12@14.734,18.406 ; R32.2 15.329,12.116 R31.2 ; v1(15.799,13.208) 15.799,12.611 R31.2 ; H1.11 H1.11@16.028,18.466 ; C313.1@16.192,16.332 16.561,16.7 18.732,16.7 18.783,16.65 C33.1@19.952,16.65 ; H1.14@12.146,18.641 12.419,18.368 13.197,18.368 H1.13@13.44,18.611 ; H1.13@13.44,18.611 13.44,18.403 13.443,18.406 H1.12@14.734,18.406 ; H1.12@14.734,18.406 14.734,18.276 14.924,18.466 H1.11@16.028,18.466 ; H1.11@16.028,18.466 16.218,18.466 16.028,18.276 H1.11@16.028,18.466
  Bottom Layer w0.254: v1(15.799,13.208) 15.57,13.437 15.57,15.723 v1(16.408,16.561)
VCC_IN: C11.1 C31.1 C111.1 C3111.1 H2.17 H2.18 H2.19 H2.20 H2.21 H2.22 H2.23 R00.2 R01.2 U1.2 U1.3 U3.2 U3.3
  other v1: 10.516,5.664 10.516,6.464 4.013,7.302 10.516,7.391 1.867,7.874 2.718,7.874 4.013,8.103 10.516,8.191
pads on no net: H1.8 H1.9 H1.10 H1.17 H2.1 H2.11 H2.12 H2.13 H2.14 H2.15 H2.16

## Polygon pours and split planes (outlines as drawn)
no net on Bottom Layer "NONET_L02_P000" (solid, pour order 0): 0.254,18.161

## Other copper
Top Layer:
  region net VCC3: 10.63,15.888 11.849,15.888 12.306,16.358 13.916,16.358 14.369,15.881 20.314,15.881 20.333,15.862 20.333,17.551 16.573,17.551 16.573,18.58 9.169,18.58 9.169,17.78 15.405,17.78 15.405,17.513 9.487,17.513 9.487,11.513 10.63,11.513
  region net NetL31_1: 10.998,11.836 10.998,13.983 11.087,13.894 12.941,13.894 12.941,13.246 11.868,13.246 11.29,12.746 11.29,12.268 11.29,11.836
  region net VCC_IN: 11.011,10.211 11.024,10.198 11.747,10.198 11.747,9.017 11.024,8.293 11.024,5.321 9.944,5.321 9.944,8.395 10.998,9.449 10.998,10.198
  region net GND: 9.804,11.252 12.878,11.252 12.878,10.427 10.625,10.427 10.625,9.461 9.804,9.461
  pour cut-out: 10.631,17.633 15.316,17.634 15.316,12.948 10.631,12.99
  pour cut-out: 20.876,13.322 25.561,13.322 25.561,8.084 20.876,8.126
  pour cut-out: 18.733,6.991 23.418,6.991 23.418,2.306 18.733,2.348
  pour cut-out: 3.9,17.545 8.585,17.545 8.585,12.86 3.9,12.901
  region net GND: 8.064,7.976 8.268,8.179 8.268,8.725 9.5,9.957 9.5,11.265 10.625,11.265 10.625,9.457 9.703,8.534 9.703,5.817 0.241,5.817 0.241,17.437 1.74,17.437 1.74,11.773 2.349,11.163 6.147,11.163 6.147,10.338 3.894,10.338 3.894,9.373 1.156,9.373 1.156,6.718 5.55,6.718 5.55,6.858 5.55,8.407 6.515,8.407 6.947,7.976
  region net VCC_IN: 4.28,10.122 4.293,10.109 5.016,10.109 5.016,8.928 4.496,8.407 4.496,7.391 4.394,7.391 3.988,7.391 1.448,7.391 1.397,7.442 1.397,8.445 3.683,8.445 3.683,8.801 4.267,9.385 4.267,10.109
  region net NetL11_1: 4.267,11.747 4.267,13.894 4.356,13.805 6.21,13.805 6.21,13.157 5.137,13.157 4.559,12.657 4.559,12.179 4.559,11.747
  region net VCC2: 3.899,17.261 4.864,17.261 4.864,15.684 4.826,15.646 3.899,15.646 3.899,11.398 2.68,11.398 2.68,17.659 0.102,17.659 0.102,18.498 7.366,18.498 7.366,17.659 3.899,17.659
  region net DCDC_VCC_IN: 27.572,3.95 27.572,6.198 29.21,6.198 29.21,3.365 27.597,3.365
  region net DCDC_VCC_IN: 21.374,9.754 21.158,9.969 19.964,9.969 19.596,10.338 18.123,10.338 18.123,9.322 19.52,9.322 19.907,8.934 21.419,8.934 21.85,8.503 22.752,8.503 22.739,8.731 22.727,8.744 22.142,8.744 21.374,9.512
  region net DCDC_VCC_IN: 23.99,8.738 24.003,8.75 24.587,8.75 25.375,9.538 25.375,9.931 26.81,9.931 27.165,10.287 27.165,10.376 28.651,10.376 28.664,10.363 28.664,9.385 27.267,9.385 26.822,8.941 25.336,8.941 24.905,8.509 23.978,8.509
  region net GND: 16.294,12.383 16.091,12.179 16.091,9.415 14.788,8.128 13.068,8.128 12.967,8.128 12.967,8.153 12.967,8.547 12.002,8.547 12.001,5.156 9.703,5.156 9.703,6.337 5.791,6.337 5.69,6.236 5.69,4.572 6.871,3.391 14.529,3.391 14.589,3.458 14.589,6.728 16.408,6.728 16.408,5.41 17.818,5.41 17.818,7.302 21.4,7.302 21.387,8.357 21.374,8.369 18.517,8.369 18.478,8.407 17.602,8.407 17.602,12.843 18.088,13.322 21.018,13.322 21.018,12.929 22.187,12.929 22.187,11.773 23.152,11.773 23.152,13.602 26.073,13.602 29.121,16.65 29.121,18.58 20.968,18.58 20.968,14.808 15.557,14.808 15.557,13.691 16.294,13.691
  region net NetC27_2: 22.898,7.188 22.898,6.35 23.838,6.35 23.838,7.188 23.52,7.506 23.52,9.233 23.228,9.233 23.228,7.499
  region net VCC1: 15.126,4.94 15.126,6.54 16.167,6.54 16.167,4.94 20.542,4.94 20.536,3.302 16.421,3.302 16.421,1.295 15.418,1.295 12.649,1.295 12.649,0.47 4.127,0.47 4.102,0.445 4.102,2.743 11.874,2.743 11.874,2.896 15.126,2.896
  region net VCC_IN: 20.688,0.448 20.688,1.46 17.208,1.461 17.209,2.794 29.362,2.794 29.362,0.406 29.375,0.394
Bottom Layer:
  region net GND: 27.754,7.29 27.754,8.395 18.313,8.395 18.313,7.29
  region net VCC_IN: 4.547,4.534 11.1,4.534 11.1,8.623 9.296,8.623 9.296,6.617 4.547,6.617 4.547,8.623 1.46,8.623 1.46,1.422 20.726,1.422 20.726,0.47 29.35,0.394 29.35,2.603 23.762,2.603 4.547,2.603
  region net DCDC_VCC_IN: 27.953,3.391 27.572,3.391 27.572,6.172 27.953,6.172 27.953,8.865 18.237,8.865 18.237,10.046 29.185,10.046 29.185,3.391

## Silkscreen, mask and mechanical layers (free items; w line width, h text height)
Bottom Overlay:
  region: 1.245,17.475 0.483,16.586 2.007,16.586
  text "PWR_M_V1" at 8.268,14.63 h1
Mechanical 1:
  pour cut-out: 11.752,12.999
  pour cut-out: 5.021,12.91
  lines w0.2: 0,0 0,19 29.464,19 29.464,0 0,0